# EAGLE board BT Board 2-sided (EAGLE 7.1.0)
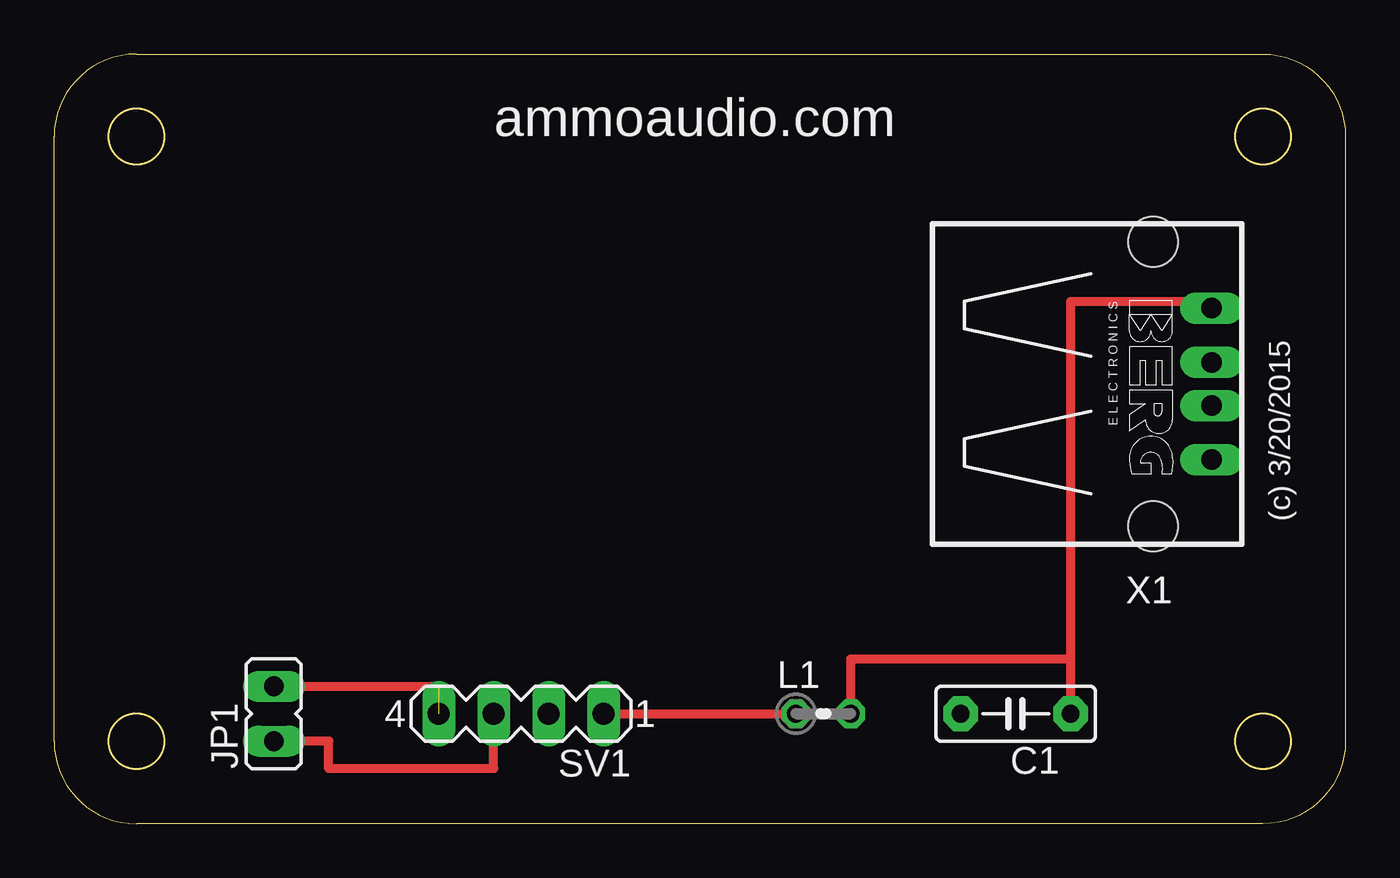
[diagram p0: board, top side]
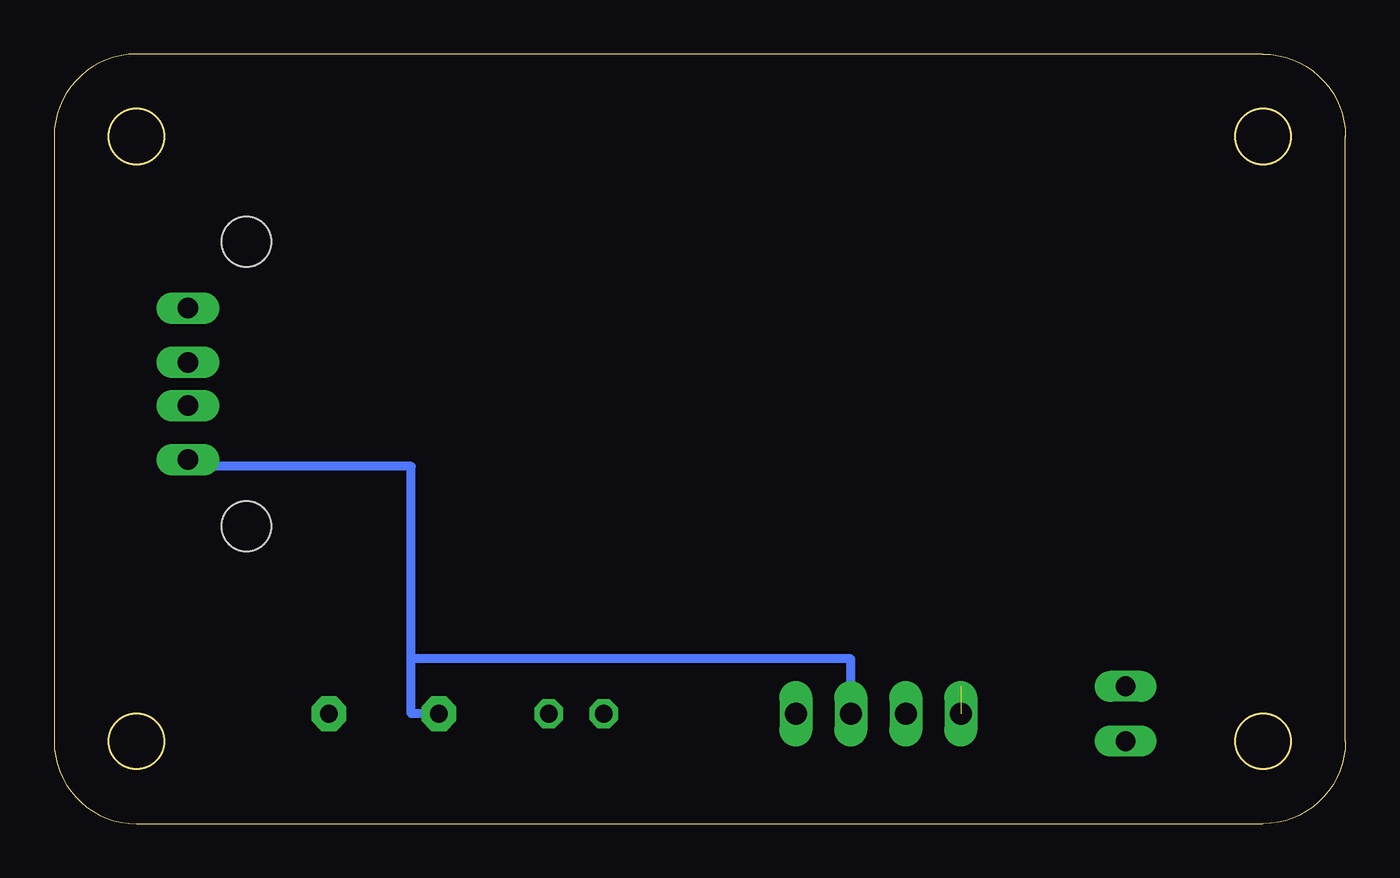
[diagram p1: board, bottom side, seen from below]

Size 59.69 x 35.56 mm. Coordinates in mm from the lower left corner, seen from the top.
Outline: 3.81,35.56 55.88,35.56 arc-90 59.69,31.75 59.69,3.81 arc-90 55.88,0 3.81,0 arc-90 0,3.81 0,31.75 arc-90 3.81,35.56
Outline: circle at 55.88,3.81 radius 1.27
Outline: circle at 55.88,31.75 radius 1.27
Outline: circle at 3.81,31.75 radius 1.27
Outline: circle at 3.81,3.81 radius 1.27
Copper layers (1*16): Top 0.035mm / dielectric 1.5mm / Bottom 0.035mm
Design rules "default": minimum track width 10mil, minimum drill 24mil, track to track 8mil, track to pad 8mil, pad to pad 8mil, via to via 8mil, smd to smd 8mil, copper to edge 40mil, drill to drill 8mil, minimum pad ring 10mil, minimum via ring 8mil, stop-mask expansion 4mil, vias tented up to drill 0mil, thermal gap 10mil

## Footprints (pad centres in the part's own frame; a part is rotated, then mirrored left to right if it is on the bottom)
C5B2.5 = drill 0.813 pad 1.6 octagon: 1 -2.54,0; 2 2.54,0
JP1 = drill 0.914 long: 1 0,-1.27; 2 0,1.27
0204V = drill 0.813 octagon: 1 -1.27,0; 2 1.27,0
MA04-1 = drill 1.016 long: 1 -3.81,0; 2 -1.27,0; 3 1.27,0; 4 3.81,0
PN87520 = drill 0.95 long: 1 -3.5,2.71; 2 -1,2.71; 3 1,2.71; 4 3.5,2.71 | hole 2.3: -6.57,0; 6.57,0

## Placement (x,y rotation side)
C1  [C5B2.5]  44.45,5.08 180 top
JP1  [JP1]  10.16,5.08 0 top
L1  [0204V]  35.56,5.08 0 top
SV1  [MA04-1]  21.59,5.08 180 top
X1  [PN87520]  50.8,20.32 270 top

## Library data of the parts
C1 = capacitor-wima
JP1 = jumper
L1 = resistor
SV1 = con-lstb; OC_FARNELL: unknown; OC_NEWARK: unknown
X1 = con-berg; OC_FARNELL: unknown; OC_NEWARK: unknown

## Nets
N$1: L1.1 SV1.1
N$2: C1.1 L1.2 X1.1
N$3: C1.2 SV1.2 X1.4
N$4: JP1.2 SV1.4
N$5: JP1.1 SV1.3

## Tracks (layer width: path | path; a pad name or v marks a point on that pad's centre or on a via)
N$1
  Top 0.406: SV1.1 L1.1
N$2
  Top 0.406: C1.1 46.99,7.62 | L1.2 36.83,7.62 46.99,7.62 | 46.99,7.62 46.99,24.13 53.51,24.13 X1.1
N$3
  Bottom 0.406: SV1.2 22.86,7.62 43.18,7.62 | C1.2 43.18,5.08 43.18,7.62 | 43.18,7.62 43.18,16.51 53.34,16.51 | 53.34,16.51 54.61,16.51 | X1.4 53.34,16.82 53.34,16.51
N$4  (1 unrouted)
  Top 0.406: JP1.2 17.78,6.35 17.78,3.81
N$5
  Top 0.406: SV1.3 20.32,2.54 12.7,2.54 12.7,3.81 JP1.1

## Text on the board
tNames: ammoaudio.com | (c) 3/20/2015